# EAGLE board ecg_final (EAGLE 9.3.0)
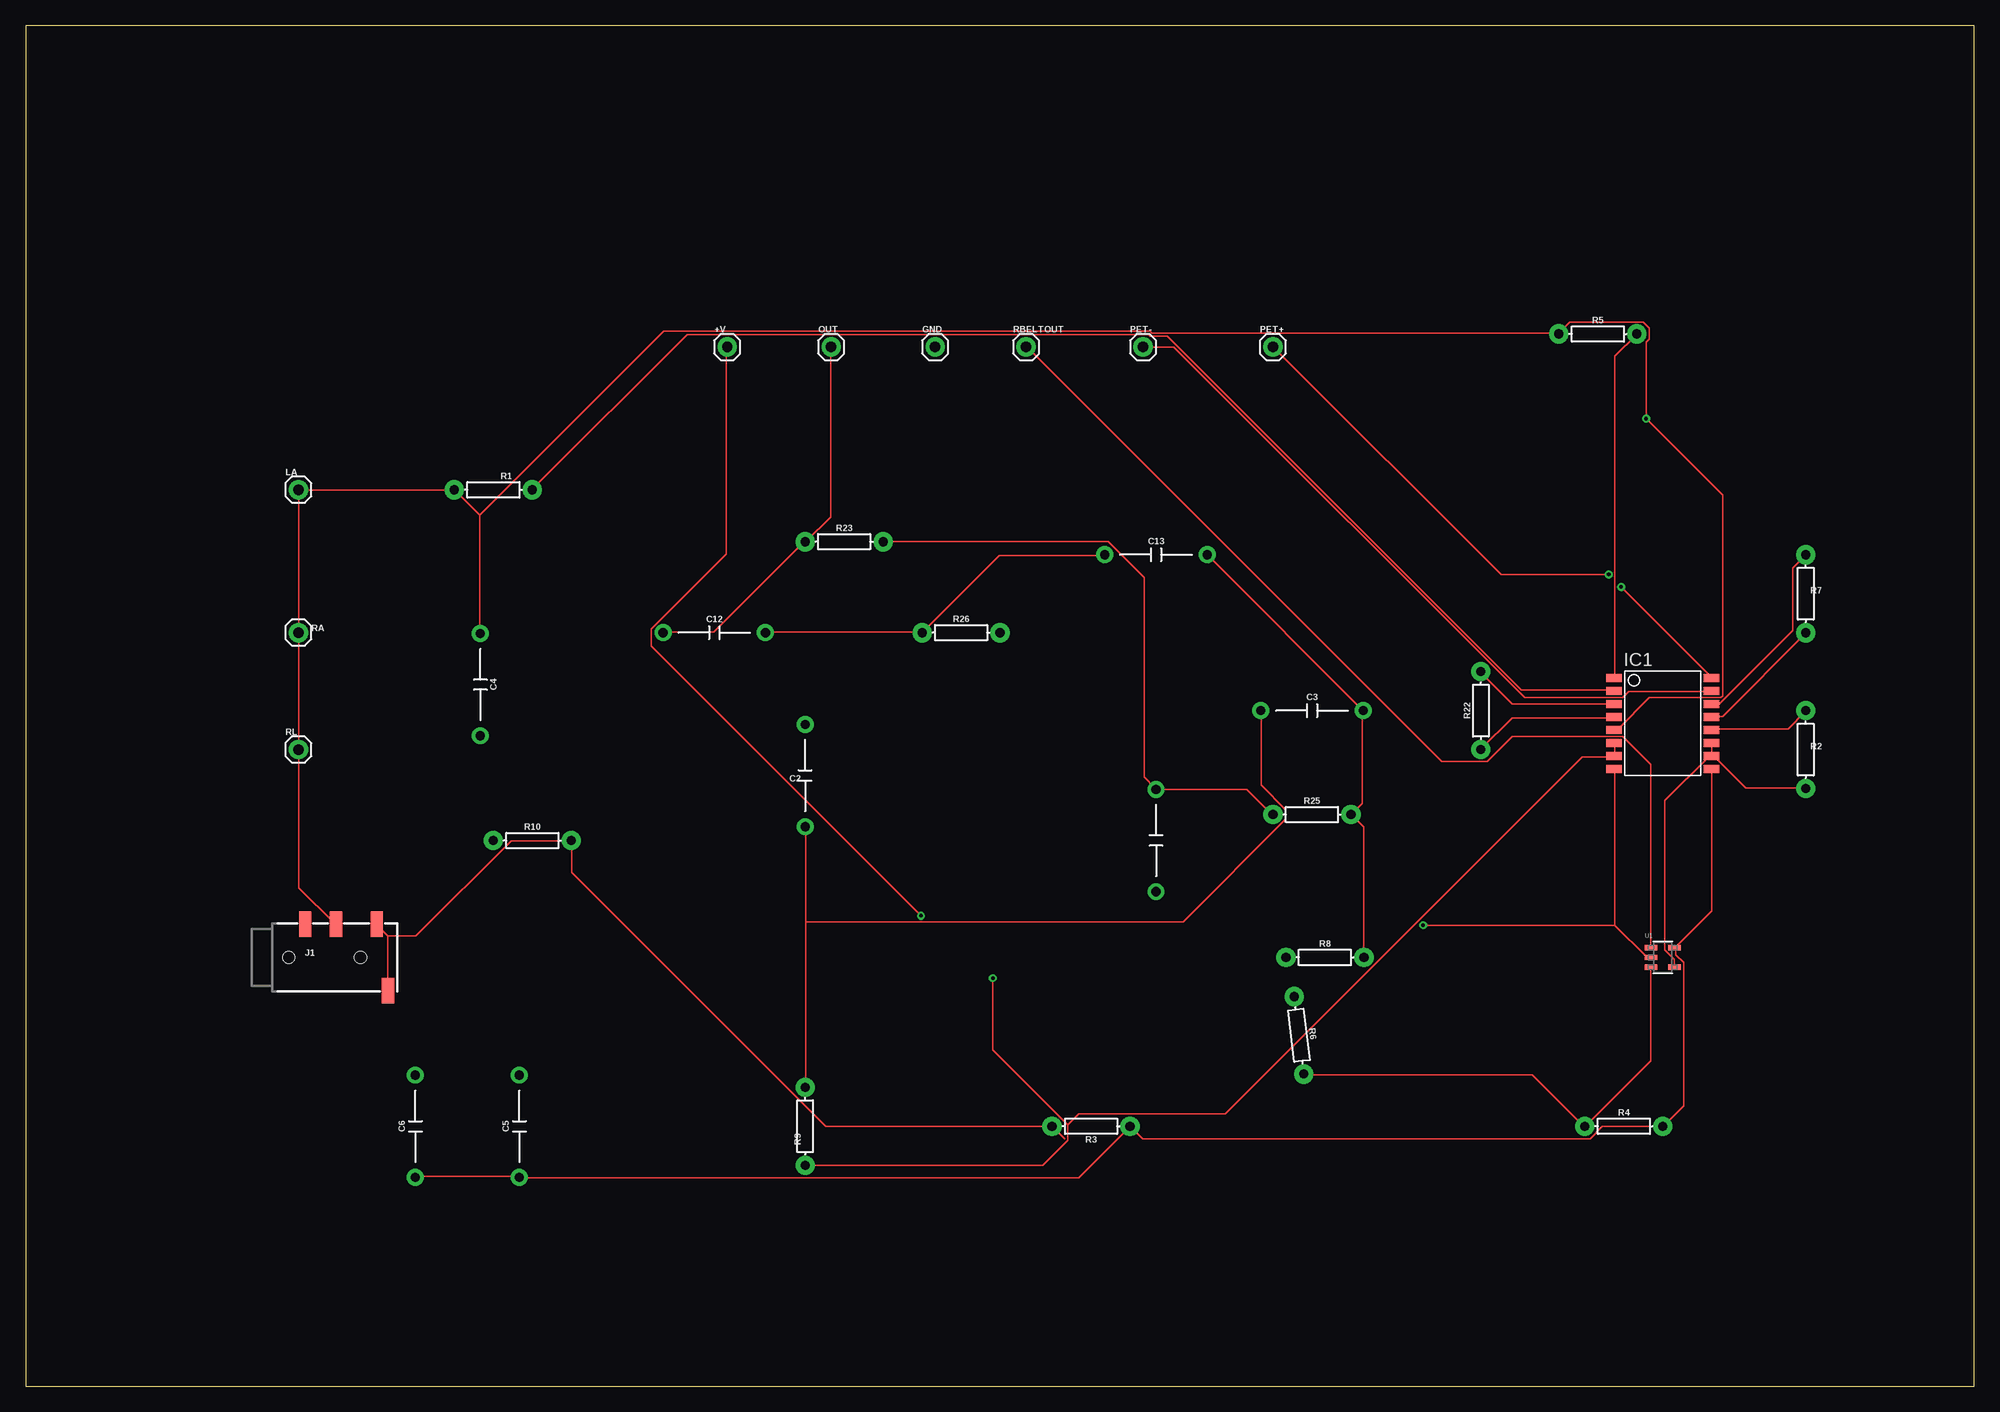
[diagram p0: board, top side]
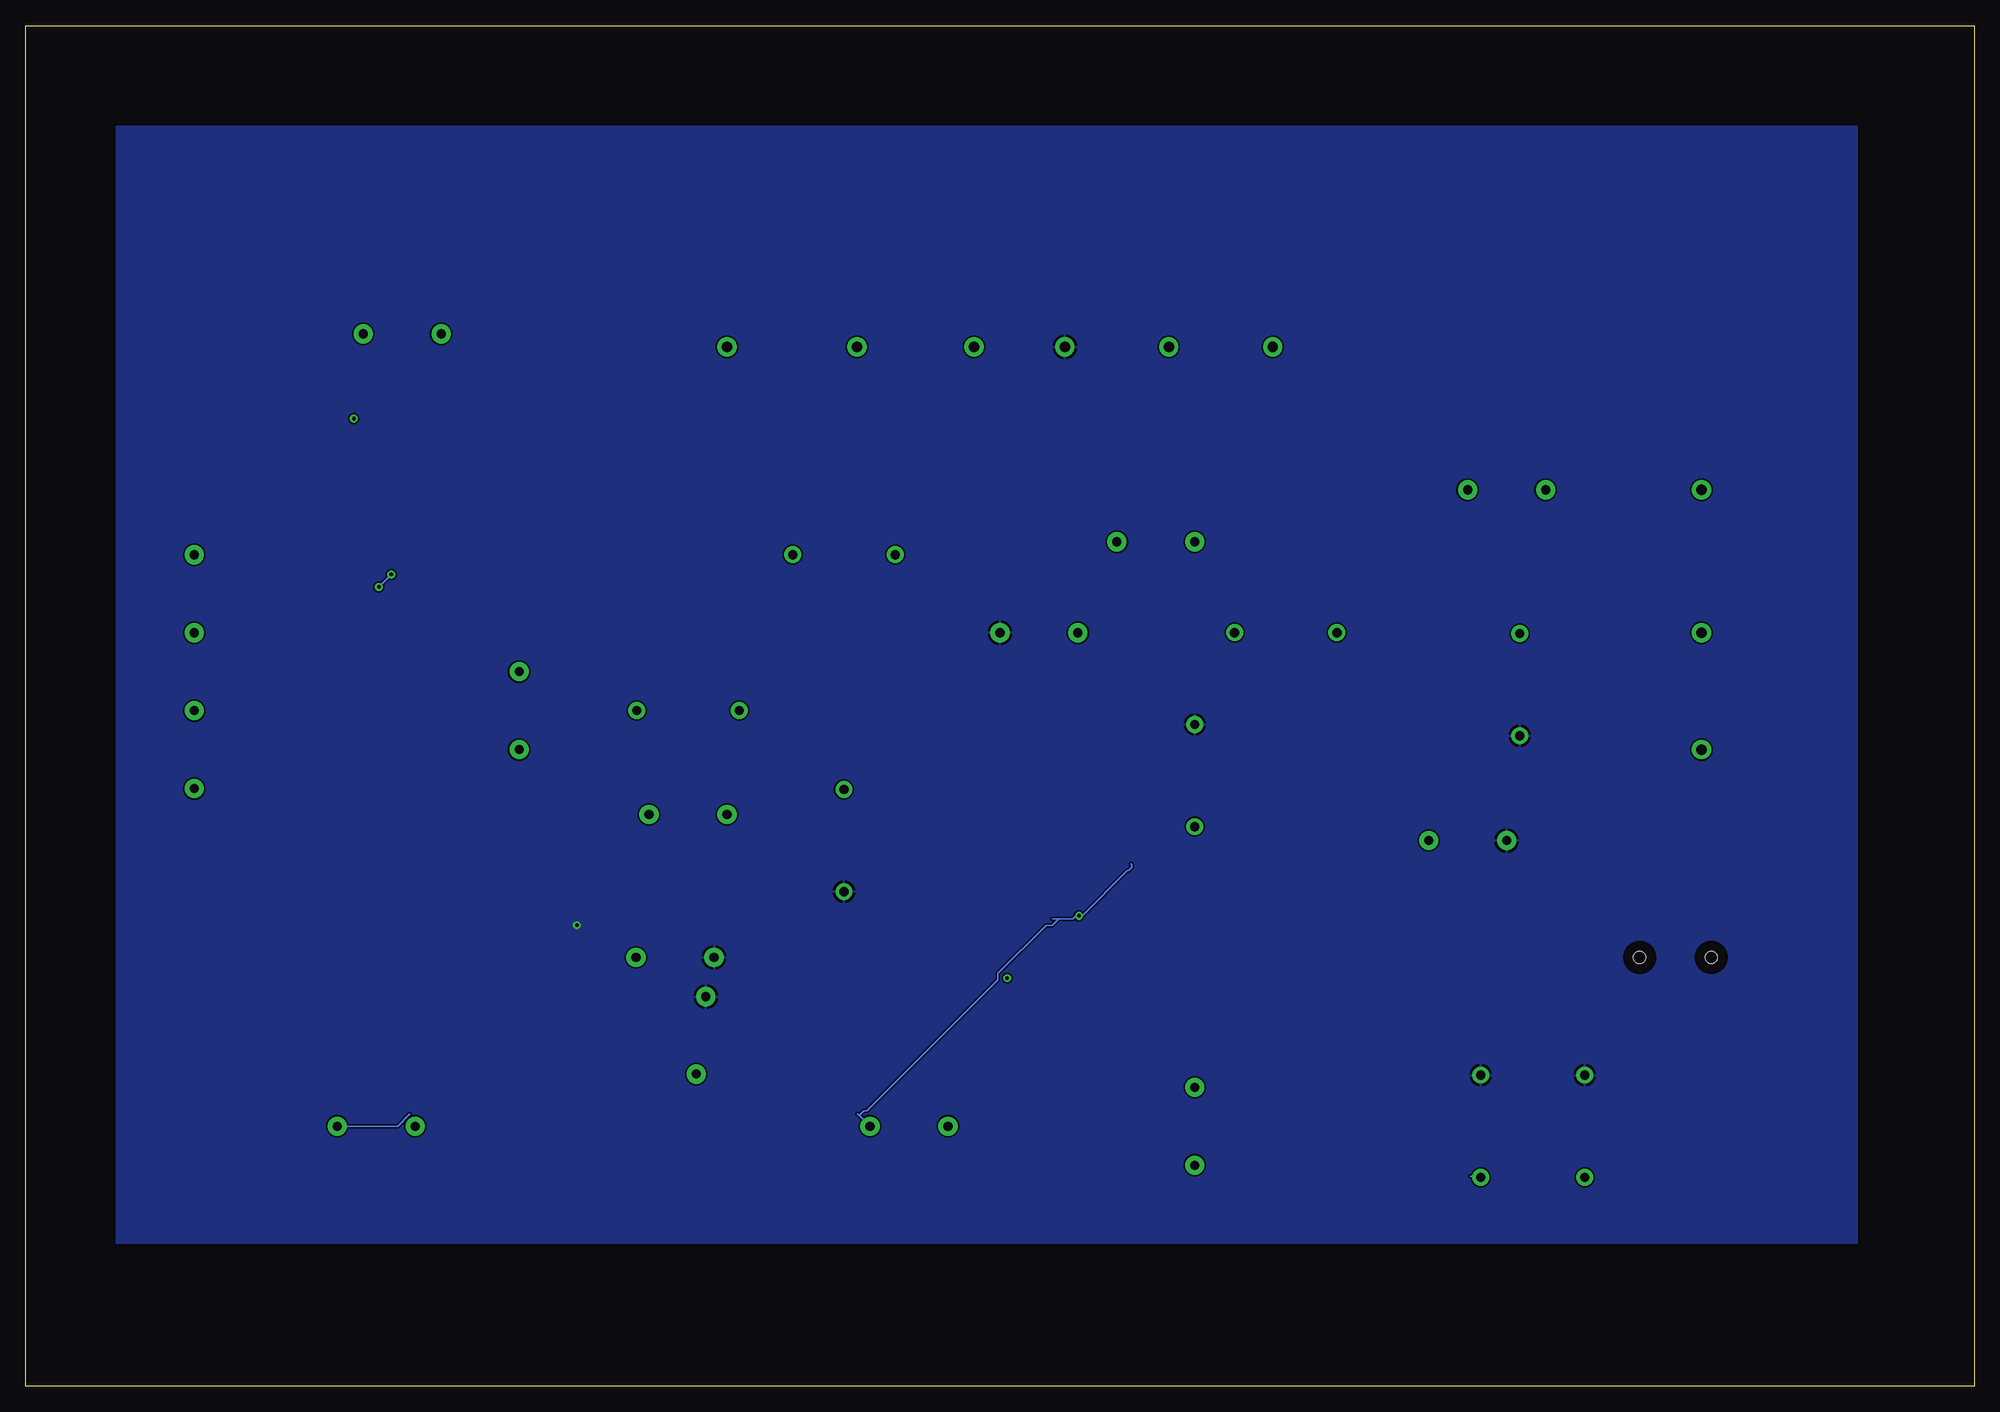
[diagram p1: board, bottom side, seen from below]

Size 190.48 x 133.02 mm. Coordinates in mm from the lower left corner, seen from the top.
Outline: 0,0 190.48,0 190.48,133.02 0,133.02 0,0
Copper layers (1*16): Top 0.035mm / dielectric 1.5mm / Bottom 0.035mm
Design rules "default": minimum track width 6mil, minimum drill 0.35mm, track to track 6mil, track to pad 6mil, pad to pad 6mil, via to via 6mil, smd to smd 6mil, copper to edge 40mil, drill to drill 6mil, minimum pad ring 10mil, minimum via ring 8mil, stop-mask expansion 4mil, vias tented up to drill 0mil, thermal gap 10mil

## Footprints (pad centres in the part's own frame; a part is rotated, then mirrored left to right if it is on the bottom)
1X01 = drill 1.016 pad 1.88: 1 0,0
CAP-PTH-10MM = drill 0.9 pad 1.651: 1 -5,0; 2 5,0
SO16-1 = smd 0.762 x 1.524: 1 -4.445,-4.775; 2 -3.175,-4.775; 3 -1.905,-4.775; 4 -0.635,-4.775; 5 0.635,-4.775; 6 1.905,-4.775; 7 3.175,-4.775; 8 4.445,-4.775; 9 4.445,4.775; 10 3.175,4.775; 11 1.905,4.775; 12 0.635,4.775; 13 -0.635,4.775; 14 -1.905,4.775; 15 -3.175,4.775; 16 -4.445,4.775
AUDIO_JACK_3.5MM_TRRS_SMD_RA = smd 1.2 x 2.5: EARTH 11.3,-3.25; RING1 6.2,3.25; RING2 3.2,3.25; TIP 10.2,3.25 | hole 1.2: 1.6,0; 8.6,0
AXIAL-0.3 = drill 0.9 pad 1.88: P$1 -3.81,0; P$2 3.81,0
SOT-5_S = smd 1.211 x 0.501: 1 -1.15,0.95; 2 -1.15,0; 3 -1.15,-0.95; 4 1.15,-0.95; 5 1.15,0.95

## Placement (x,y rotation side)
+V  [1X01]  68.58,101.6 0 top
C1  10nF  [CAP-PTH-10MM]  110.49,53.34 270 top
C2  0.1uF  [CAP-PTH-10MM]  76.2,59.69 90 top
C3  1uF  [CAP-PTH-10MM]  125.73,66.04 0 top
C4  10nF  [CAP-PTH-10MM]  44.45,68.58 270 top
C5  10uF  [CAP-PTH-10MM]  48.26,25.4 90 top
C6  0.1uF  [CAP-PTH-10MM]  38.1,25.4 90 top
C12  5nF  [CAP-PTH-10MM]  67.31,73.66 0 top
C13  5nF  [CAP-PTH-10MM]  110.49,81.28 0 top
GND  [1X01]  88.9,101.6 0 top
IC1  INA2128U  [SO16-1]  160.02,64.77 270 top
J1  AUDIO_JACK_TRRSSMD_RA  [AUDIO_JACK_3.5MM_TRRS_SMD_RA]  24.13,41.91 0 top
LA  [1X01]  26.67,87.63 0 top
OUT  [1X01]  78.74,101.6 0 top
PET+  [1X01]  121.92,101.6 0 top
PET-  [1X01]  109.22,101.6 0 top
R1  220k  [AXIAL-0.3]  45.72,87.63 0 top
R2  220k  [AXIAL-0.3]  173.99,62.23 270 top
R3  1k  [AXIAL-0.3]  104.14,25.4 180 top
R4  220k  [AXIAL-0.3]  156.21,25.4 0 top
R5  220k  [AXIAL-0.3]  153.67,102.87 0 top
R6  220k  [AXIAL-0.3]  124.46,34.29 277.1 top
R7  220k  [AXIAL-0.3]  173.99,77.47 270 top
R8  4M  [AXIAL-0.3]  127,41.91 0 top
R9  10k  [AXIAL-0.3]  76.2,25.4 90 top
R10  1k  [AXIAL-0.3]  49.53,53.34 0 top
R22  25  [AXIAL-0.3]  142.24,66.04 90 top
R23  470k  [AXIAL-0.3]  80.01,82.55 0 top
R25  470k  [AXIAL-0.3]  125.73,55.88 0 top
R26  220k  [AXIAL-0.3]  91.44,73.66 0 top
RA  [1X01]  26.67,73.66 0 top
RBELTOUT  [1X01]  97.79,101.6 0 top
RL  [1X01]  26.67,62.23 0 top
U1  LT1716CS5TRPBF  [SOT-5_S]  160.02,41.91 0 top

## Library data of the parts
+V GND LA OUT PET+ PET- RA RBELTOUT RL = SparkFun-Connectors
C1-C6 C12 C13 = SparkFun-Capacitors; PROD_ID: CAP-09321
IC1 = burr-brown; MF: TEXAS INSTRUMENTS; MPN: INA2128U; OC_FARNELL: 1212421; OC_NEWARK: 28C7388
J1 = SparkFun-Connectors; PROD_ID: CONN-10676; SF_ID: PRT-12639
R1 R2 R4-R7 = SparkFun-Resistors; PROD_ID: RES-12183
R3 R8-R10 = SparkFun-Resistors; PROD_ID: RES-12182
R22 R23 R25 R26 = SparkFun-Resistors; PROD_ID: RES-08380
U1 = LT1716CS5TRPBF; DESCRIPTION: LT1716 - SOT-23, 44V, Over-The-Top, Micropower, Precision Rail-to-Rail Comparator; DIGI-KEY_PART_NUMBER: LT1716CS5#TRPBFCT-ND; DIGI-KEY_PURCHASE_URL: https://www.digikey.com/product-detail/en/linear-technology-analog-devices/LT1716CS5-TRPBF/LT1716CS5-TRPBFCT-ND/7897918?utm_source=snapeda&utm_medium=aggregator&utm_campaign=symbol; MF: Linear Technology; MP: LT1716CS5#TRPBF; PACKAGE: TSOT-23 Linear Technology

## Nets
+V: +V.1 C5.1 C6.1 IC1.9 R3.P$1 R4.P$2 U1.5
GND: C1.2 C2.2 C4.2 C5.2 C6.2 GND.1 IC1.8 R6.P$1 R8.P$1 R10.P$1 R26.P$2 U1.2
LAA: IC1.2 R1.P$2
N$3: C12.2 C13.1 R26.P$1
N$4: IC1.6 IC1.7 R9.P$1
N$8: IC1.4 R22.P$1
N$9: C2.1 C3.1 R9.P$2
N$10: IC1.1 R5.P$2
N$12: IC1.10 IC1.11 R2.P$2 U1.4
N$14: IC1.16 PET+.1
N$15: IC1.12 R2.P$1
N$16: C1.1 R23.P$2 R25.P$1
N$17: R4.P$1 R6.P$2 U1.3
N$18: C3.2 C13.2 R8.P$2 R25.P$2
N$19: IC1.13 R7.P$2
N$20: IC1.14 R7.P$1
N$21: IC1.15 PET-.1
N$22: RBELTOUT.1 U1.1
N$23: IC1.3 R22.P$2
OUT: C12.1 OUT.1 R23.P$1
RL: C4.1 IC1.5 J1.EARTH J1.RING1 J1.TIP LA.1 R1.P$1 R3.P$2 R5.P$1 R10.P$2 RA.1 RL.1

## Tracks (layer width: path | path; a pad name or v marks a point on that pad's centre or on a via)
+V  (via drill 0.35)
  Top 0.152: R3.P$1 107.95,25.55 | v87.53,45.97 61.16,72.34 61.16,74.02 68.48,81.33 68.48,101.6 +V.1 | IC1.9 164.79,46.43 161.29,42.93 U1.5 161.29,42.77 161.29,42.16 162.05,41.4 162.05,27.38 160.07,25.4 R4.P$2 154.13,25.4 152.91,24.18 109.17,24.18 R3.P$1 | C6.1 38.15,20.52 48.21,20.52 C5.1 48.36,20.37 102.92,20.37 R3.P$1
  Bottom 0.152: 82.4,51.05 82.4,50.95 | 68.63,101.6 +V.1 | R4.P$2 154.13,25.4 152.91,26.62 | R3.P$1 109.02,26.47 | 109.02,26.47 109.17,26.62 | 82.45,51.05 82.4,51.05 | 89.51,45.67 88.14,45.67 87.53,46.28 v87.53,45.97 87.22,45.97 82.8,50.39 82.65,50.39 82.35,50.7 82.35,51 82.4,51.05 | 89.51,45.67 90.12,45.67 | 49.28,20.52 48.36,20.52 C5.1 | 89.51,45.67 90.12,45.06 90.73,45.06 95.45,40.34 95.45,39.73 108.25,26.92 108.56,26.92 109.02,26.47
GND  (via drill 0.35)
  Top 0.152: 158.39,42.01 158.85,42.01 U1.2 158.39,42.01 | 110.54,48.26 C1.2 110.39,48.41 | 123.19,42.01 R8.P$1 123.19,41.86 | 155.35,45.06 158.39,42.01 | 155.35,45.06 155.35,60.3 IC1.8 | v136.6,45.06 155.35,45.06
  Bottom 0.152: 123.19,42.01 R8.P$1
  pour Bottom: 11.43,123.19 11.43,13.97 181.61,13.97 181.61,26.67 181.61,123.19
LAA
  Top 0.152: 49.53,87.73 R1.P$2 49.58,87.73 64.67,102.82 109.78,102.82 109.93,102.67 111.61,102.67 146.2,68.07 155.19,68.07 IC1.2
N$3
  Top 0.152: C12.2 72.44,73.71 87.53,73.71 R26.P$1 95.15,81.18 105.36,81.18 C13.1
  Bottom 0.152: 105.46,81.18 C13.1
N$4  (via drill 0.35)
  Top 0.152: IC1.6 155.35,62.74 155.35,61.67 IC1.7 155.19,61.52 152.15,61.52 117.25,26.62 102.92,26.62 101.85,25.55 | v94.54,39.88 94.54,32.87 101.85,25.55 | 101.85,25.55 101.85,24.03 99.42,21.59 R9.P$1
  Bottom 0.152: 76.25,21.59 R9.P$1
N$8
  Top 0.152: IC1.4 155.19,65.33 145.29,65.33 142.24,62.28 R22.P$1
N$9
  Top 0.152: 76.25,45.36 76.25,29.21 R9.P$2 | 76.25,45.36 76.25,54.66 C2.1 | 76.25,45.36 113.13,45.36 123.19,55.42 123.19,56.34 120.75,58.78 120.75,65.94 C3.1
  Bottom 0.152: 120.6,65.94 C3.1 | 76.25,54.81 C2.1
N$10
  Top 0.152: IC1.1 155.35,69.29 155.35,100.69 157.48,102.82 R5.P$2
N$12
  Top 0.152: 164.49,61.52 164.79,61.52 IC1.10 | U1.4 161.14,41.1 161.14,41.71 160.22,42.62 160.22,57.25 164.49,61.52 | 164.79,61.82 IC1.11 | 164.79,61.67 IC1.10 | 164.49,61.52 IC1.10 | 164.79,61.82 168.15,58.47 173.94,58.47 R2.P$2 | 164.79,61.82 IC1.10
N$14  (via drill 0.35)
  Top 0.152: v155.96,78.13 164.79,69.29 IC1.16 | v154.74,79.35 144.22,79.35 121.97,101.6 PET+.1
  Bottom 0.152: v154.74,79.35 v155.96,78.13
N$15
  Top 0.152: IC1.12 164.79,64.26 172.26,64.26 173.94,65.94 R2.P$1
N$16
  Top 0.152: R25.P$1 121.82,55.88 119.38,58.32 110.54,58.32 C1.1 110.39,58.47 109.32,59.54 109.32,79.05 105.82,82.55 R23.P$2
N$17
  Top 0.152: U1.3 158.85,40.95 158.85,31.8 152.45,25.4 R4.P$1 152.3,25.4 147.27,30.43 125.02,30.43 R6.P$2
N$18
  Top 0.152: 129.59,55.88 130.66,56.95 130.66,65.94 C3.2 130.66,66.09 115.57,81.18 C13.2 | 129.59,55.88 130.81,54.66 R8.P$2 | 129.59,55.88 R25.P$2
N$19
  Top 0.152: IC1.13 164.79,65.48 165.86,65.48 173.94,73.56 R7.P$2
N$20
  Top 0.152: IC1.14 164.79,66.7 165.56,66.7 172.72,73.86 172.72,79.96 173.94,81.18 R7.P$1
N$21
  Top 0.152: IC1.15 164.79,67.92 156.72,67.92 156.11,67.31 146.51,67.31 112.22,101.6 PET-.1
N$22
  Top 0.152: U1.1 158.85,42.93 158.85,60.76 156.11,63.5 145.29,63.5 142.85,61.06 138.43,61.06 97.89,101.6 RBELTOUT.1
N$23
  Top 0.152: IC1.3 155.19,66.7 145.29,66.7 142.24,69.75 R22.P$2
OUT
  Top 0.152: C12.1 62.38,73.71 67.26,73.71 76.1,82.55 R23.P$1 76.25,82.55 78.69,84.99 78.69,101.6 OUT.1
RL  (via drill 0.35)
  Top 0.152: 101.55,24.18 R3.P$2 78.23,25.4 53.39,50.24 53.39,53.29 R10.P$2 | 41.91,87.58 R1.P$1 | 53.24,53.44 R10.P$2 | IC1.5 155.35,64.26 155.65,64.26 158.7,67.31 165.71,67.31 165.86,67.46 165.86,87.12 v158.39,94.59 158.39,102.06 158.7,102.36 158.7,103.43 158.09,104.04 150.93,104.04 149.86,102.97 | 44.4,85.14 44.4,73.71 C4.1 | R1.P$1 44.4,85.14 | 26.72,87.58 26.72,73.71 RA.1 26.72,73.56 26.72,62.28 RL.1 26.72,62.13 26.72,48.72 30.23,45.21 J1.RING1 30.38,45.21 34.19,45.21 J1.TIP 34.34,45.06 35.41,43.99 | 26.72,87.58 41.81,87.58 R1.P$1 | 26.72,87.58 LA.1 | 35.41,43.99 35.41,38.81 J1.EARTH | 35.41,43.99 38.15,43.99 47.45,53.29 53.24,53.29 R10.P$2 | 149.86,102.97 110.08,102.97 109.93,103.12 62.38,103.12 44.4,85.14 | 149.86,102.97 R5.P$1
  Bottom 0.152: 150.16,102.82 149.86,102.82 R5.P$1